# Altium PCB CANLink.PcbDoc (part 2 of 2)
Units mm, origin at the board's own origin, x right, y up, seen from the top; angles counter-clockwise.
Board outline 75 x 49 mm, 2 copper layers (Top Layer, Bottom Layer); 106 components, 90 nets, 440 pads, 174 vias.
Unrouted connection lines stored in the file: 6.
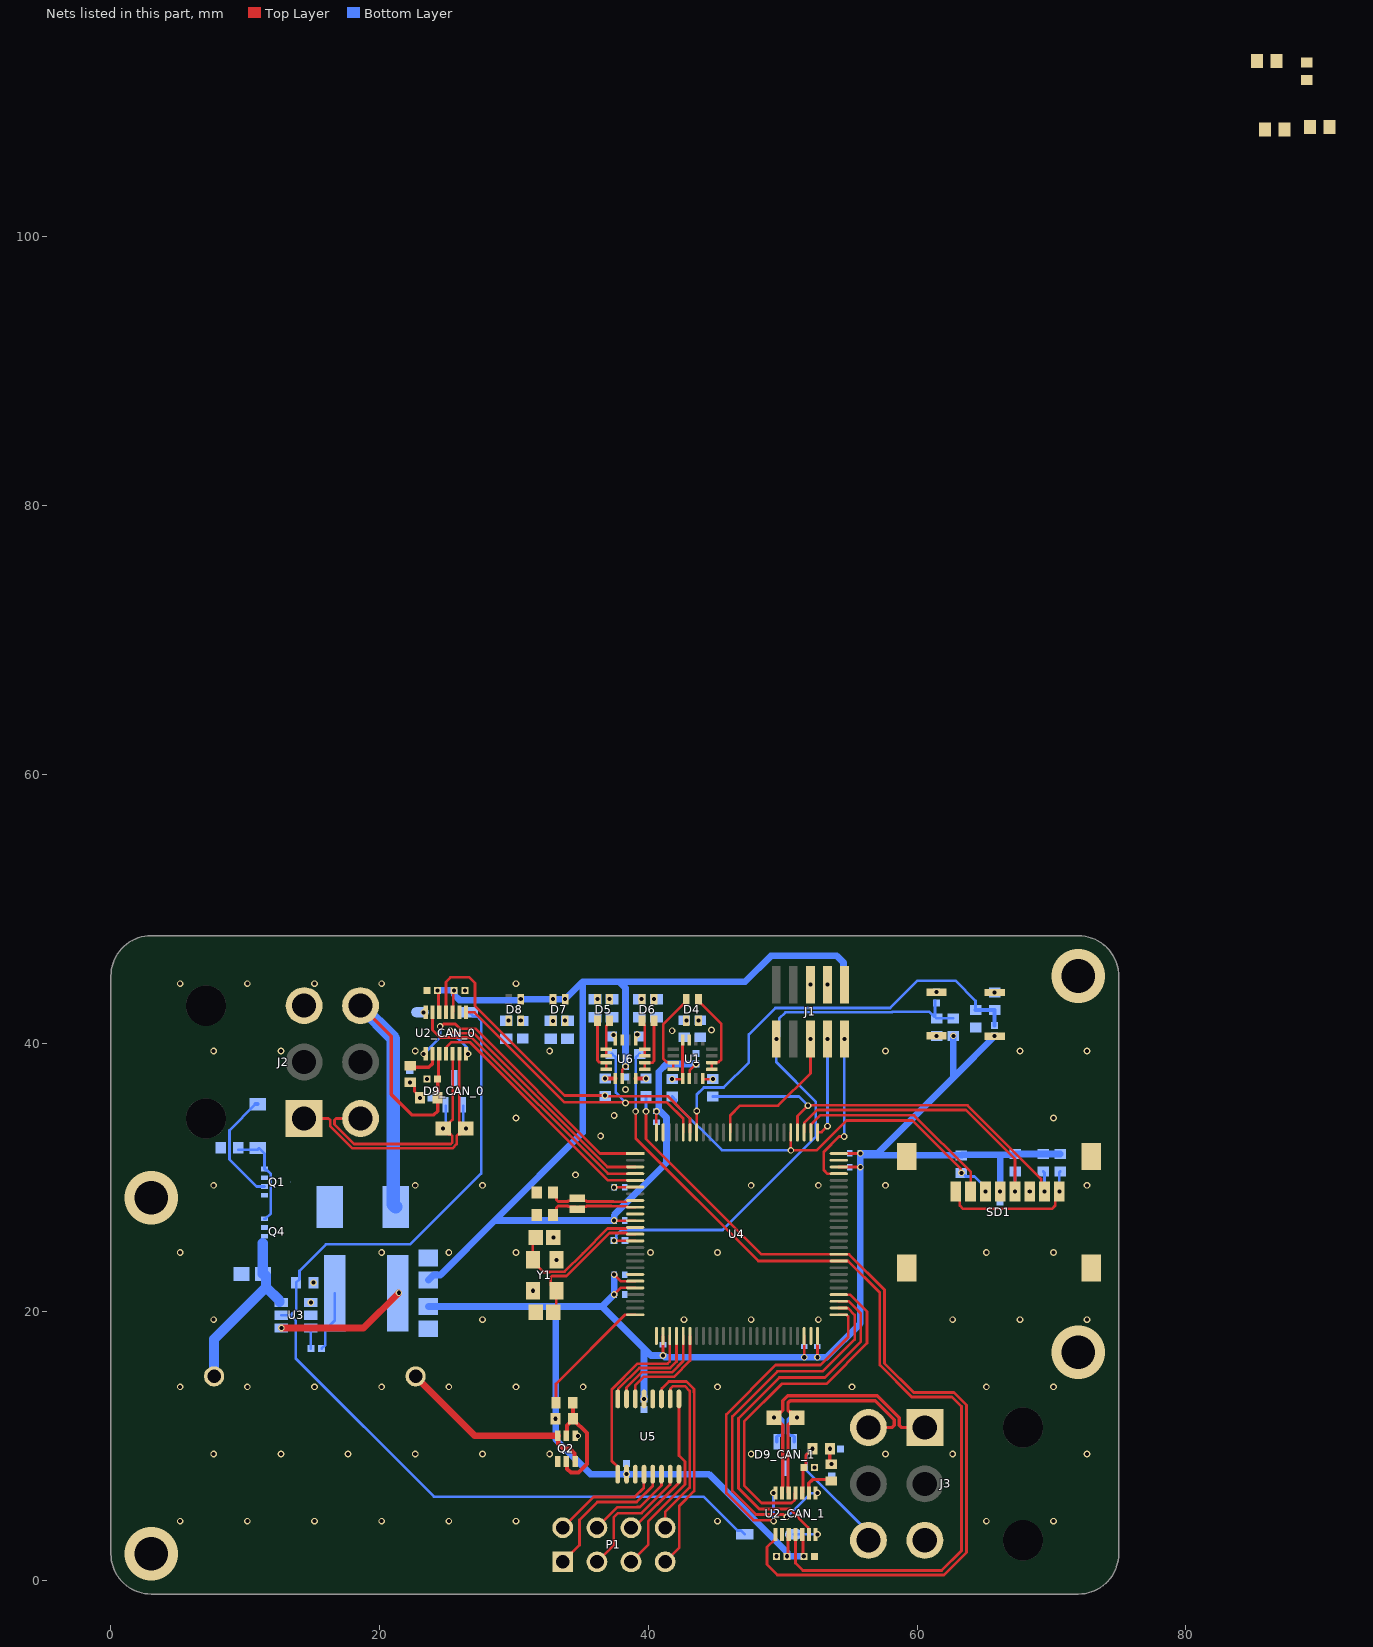
[diagram p2: the nets of this part, all layers, seen from the top]

## Part data (continued)
U3: library part CMP-12757-000006-1, "IC REG BUCK 3.3V 2A TSOT26", Ambient Temperature Range High=+85°C, Ambient Temperature Range Low=-40°C, Manufacturer="Diodes Inc.", Max Junction Temp=+160°C, Max Supply Voltage=32V, Min Supply Voltage=3.8V, Nominal Supply Current=22uA, Output Current=2A, Output Voltage=3.3V, Package=TSOT26, Switching Frequency=1.1MHz, Temperature="to +160°C", Automotive=No, Category=IC, ComponentLink2Description=Datasheet, ComponentLink2URL=https://www.diodes.com/assets/Datasheets/AP63200-AP63201-AP63203-AP63205.pdf, Device Class L1="Integrated Circuits (ICs)", Device Class L2="Power Management ICs", Device Class L3="Voltage Regulators - Switching", Digikey Description="IC REG BUCK 3.3V 2A TSOT26", Footprint Url=https://www.diodes.com/assets/Package-Files/TSOT26.pdf, Height=1mm, Lead Free=Yes, Manufacturer Part Number=AP63203WU-7, Mouser Description="AP63203 Series 3.3 V 2 A SMT Fixed Low IQ Synchronous Buck - TSOT-26", Number of Outputs=1, Octopart=https://octopart.com/ap63203wu-7-diodes+inc.-98099550, Output Type=Fixed, RoHS=TRUE, Standoff Height=0.01mm, Switching Topology=Buck, Temperature Range High=+160°C
U4: library part CMP-12105-000107-1, "IC MCU 32BIT 128KB FLASH 100LQFP"
U5: library part CMP-0054-00372-2, "8-Channel, 50 kSPS to 200 kSPS, 8-Bit A/D Converter, 16-pin TSSOP, Pb-Free", Manufacturer="National Semiconductor", PackageTopMarking=NSUZXYTT*88S022*CIMT, PowerWise=Y, Code_JEDEC=MO-153-AB, ComponentLink1Description="ADC088S022 Datasheet", ComponentLink1URL=http://www.national.com/ds/AD/ADC088S022.pdf, ComponentLink2Description="ADC088S022 Web Page", ComponentLink2URL=http://www.national.com/pf/AD/ADC088S022.html, ComponentLink3Description="MTC16 Package Page", ComponentLink3URL=http://www.national.com/packaging/folders/mtc16.html, CompType="ADC IC", DatasheetVersion=Feb-2010, PackageDescription="Molded TSSOP, Jedec, 5 x 4.4 x 0.9mm Body, 16 Lead, 0.65mm Pitch", PackageReference=MTC16, PackageVersion="revD, Jun-2003", PinCount=16, RevisionNote="Component URLs added", RoHS=Y
Y1: library part CMP-27762-011708-1, "Crystal 48MHz ±20ppm 18pF SMD-4 3.2mm x 2.5mm", Case/Package=CSMD, ESR (Equivalent Series Resistance)=35R, Frequency=48MHz, Frequency Stability=50ppm, Frequency Tolerance=20ppm, Load Capacitance=18pF, Max Operating Temperature=70°C, Min Operating Temperature=-20°C, Operating Frequency="48 MHz", Package Quantity=1000, Resistor Type=Ceramic, Depth=2.5mm, Height=0.031inch, Lead Free="Lead Free", Length=3.2mm, Mount="Surface Mount", Number of Pins=4, Packaging="Tape and Reel", Radiation Hardening=No, REACH SVHC="No SVHC", RoHS Compliant=Yes, Series=ABM8, Series Resistance=35R, Termination=SMD/SMT, Tolerance=20ppm, Width=0.098inch
Y2: library part CMP-40224-000006-1, "CRYSTAL 32.7680KHZ 12.5PF SMD", Frequency=32.768kHz, Load Capacitance=12.5pF, Manufacturer="ECS International", Package=ECX-1210, Temperature="-40°C to +85°C", Temperature Range High=+85°C, Temperature Range Low=-40°C, Tolerance=20ppm, Automotive=No, Category=Crys, ComponentLink2Description=Datasheet, ComponentLink2URL=https://ecsxtal.com/store/pdf/ECX-1210.pdf, Device Class L1="Passive Components", Device Class L2="Crystals / Oscillators", Device Class L3=Crystals, Digikey Description="CRYSTAL 32.7680KHZ 12.5PF SMD", Esr=90kΩ, Height=0.5mm, Lead Free=Yes, Manufacturer Part Number=ECS-.327-12.5-1210-TR, Octopart=https://octopart.com/ecs-.327-12.5-1210-tr-ecs+international-81221340, RoHS=TRUE, Series=ECX-1210

## Via types
v1: diameter 0.5, hole 0.3, Top Layer to Bottom Layer, 170 vias
v2: diameter 4, hole 2.5, Top Layer to Bottom Layer, 4 vias

## Nets (pads, with @x,y where several pads share a name; then routed paths per layer and width w, separated by ;. In a path a pad name is that pad's centre, name@x,y a point inside that pad or via, vN(x,y) a via of type N, cw(c..) or ccw(c..) an arc to the next point about the centre after c; other vN are vias at no path point)
AN_IO_0: P1.2 U5.4 | length 8.3
  Top Layer w0.2: P1.2@33.63,3.94 35.915,6.225 38.975,6.225 39.663,6.913 39.663,7.913 U5.4@39.675,7.925
AN_IO_1: P1.1 U5.5 | length 11
  Top Layer w0.2: P1.1@33.63,1.4 34.875,2.645 34.875,4.525 36.2,5.85 39.125,5.85 40.325,7.05 U5.5@40.325,7.925
AN_IO_2: P1.4 U5.6 | length 7
  Top Layer w0.2: P1.4@36.17,3.94 37.703,5.473 39.148,5.473 39.15,5.475 39.375,5.475 40.975,7.075 U5.6@40.975,7.925
AN_IO_3: P1.3 U5.7 | length 9.8
  Top Layer w0.2: P1.3@36.17,1.4 37.425,2.655 37.425,4.725 37.725,5.025 39.5,5.025 41.614,7.139 41.614,7.914 U5.7@41.625,7.925
AN_IO_4: P1.6 U5.8 | length 5.6
  Top Layer w0.2: P1.6@38.71,3.94 38.94,3.94 42.246,7.246 42.246,7.896 U5.8@42.275,7.925
AN_IO_5: P1.5 U5.9 | length 14
  Top Layer w0.2: P1.5@38.71,1.4 40,2.69 40,4.425 42.725,7.15 42.725,8.85 42.275,9.3 U5.9@42.275,13.525
AN_IO_6: P1.8 U5.10 | length 13.4
  Top Layer w0.2: P1.8@41.25,3.94 41.25,5.1 43.075,6.925 43.075,13.888 43.073,13.89 43.073,14.115 42.713,14.475 41.825,14.475 41.648,14.298 41.648,13.548 U5.10@41.625,13.525
AN_IO_7: P1.7 U5.11 | length 17.4
  Top Layer w0.2: U5.11@40.975,13.525 40.998,13.548 40.998,14.298 41.525,14.825 42.825,14.825 43.4,14.25 43.4,14.025 43.402,14.023 43.402,6.677 42.3,5.575 42.3,2.45 P1.7@41.25,1.4
BOOT: C30.1 R35.2 R36.1 U4.94 | length 32.2
  Top Layer w0.2: U4.94@43.594,33.363 43.596,33.366 43.596,34.946 v1(43.6,34.95)
  Bottom Layer w0.2: v1(43.6,34.95) 43.6,36.175 44.125,36.7 45.6,36.7 47.475,38.575 47.475,40.65 49.45,42.625 57.998,42.625 60.023,44.65 62.85,44.65 64.35,43.15 R35.2@64.35,42.475
  Bottom Layer w0.3: R35.2@64.35,42.475 R36.1@65.775,42.475 C30.1@65.775,41.325
BUZZ: R28.1 U4.25 | length 9.4
  Top Layer w0.2: R28.1@33.125,13.25 33.125,14.65 38.263,19.788 U4.25@39.019,19.788
BUZZ_NEG: LS1.N Q2.3 Q2.6 | length 15.1
  Top Layer w0.3: Q2.6@33.249,10.774 Q2.6@33.25,10.775 33.292,10.733 33.292,10.181 33.65,9.823 34.16,9.823 34.511,9.472 34.511,8.914 Q2.3@34.55,8.875
  Top Layer w0.5: LS1.N@22.675,15.2 27.101,10.774 Q2.6@33.249,10.774
  Bottom Layer w0.3: LS1.N@22.674,15.199 LS1.N@22.675,15.2
CAN0_N: D9_CAN_0.2 J2.4 R10_CAN_0.1 U2_CAN_0.12 | length 20.8
  Top Layer w0.2: J2.4@18.58,34.395 16.761,34.395 16.643,34.278 16.643,33.963 18.107,32.499 25.287,32.499 25.404,32.616 25.404,33.1 25.287,33.217 25.143,33.217 v1(24.718,33.642) 24.768,33.642 25.433,34.307 U2_CAN_0.12@25.433,39.211
  Bottom Layer w0.2: v1(24.718,33.642) 24.718,33.723 24.918,33.923 D9_CAN_0.2@24.918,35.318
CAN0_P: D9_CAN_0.1 J2.1 R10_CAN_0.2 U2_CAN_0.13 | length 21.8
  Top Layer w0.2: J2.1@14.38,34.395 16.199,34.395 16.317,34.278 16.317,33.827 17.972,32.172 25.423,32.172 25.731,32.481 25.731,33.1 25.849,33.217 25.993,33.217 v1(26.418,33.642) 26.368,33.642 25.943,34.067 25.943,34.174 25.933,34.184 U2_CAN_0.13@25.933,39.211
  Bottom Layer w0.2: D9_CAN_0.1@26.218,35.318 26.218,33.923 26.418,33.723 v1(26.418,33.642)
CAN0_RX: R19.1 U2_CAN_0.4 U4.95 | length 27
  Top Layer w0.2: U2_CAN_0.4@24.933,42.297 24.933,44.558 25.275,44.9 26.675,44.9 27.1,44.475 27.1,42.762 33.76,36.102 v1(36.775,36.102) 36.827,36.05 41.45,36.05 43.094,34.406 U4.95@43.094,33.363
CAN0_TX: R22.1 U2_CAN_0.1 U4.96 | length 24.6
  Top Layer w0.2: U2_CAN_0.1@26.433,42.297 27.053,42.297 33.75,35.6 38.25,35.6 v1(38.3,35.55) ; v1@38.3,35.6 41.375,35.6 42.594,34.381 U4.96@42.594,33.363
  Bottom Layer w0.2: R22.1@37.25,39.2 37.3,39.2 37.575,38.925 37.575,36.325 38.3,35.6 v1(38.3,35.55)
CAN1_N: D9_CAN_1.2 J3.4 R10_CAN_1.1 U2_CAN_1.12 | length 21
  Top Layer w0.254: U2_CAN_1.12@50.448,6.532 50.422,6.557 50.422,6.945 50.388,6.979 50.388,9.161 50.391,9.163 50.391,11.578 50.539,11.727 50.652,11.727 v1(51.05,12.125) 50.652,12.523 50.539,12.523 50.391,12.672 50.391,13.226 50.539,13.375 56.883,13.375 58.284,11.974 58.284,11.549 58.136,11.4 J3.4@56.375,11.4
  Bottom Layer w0.254: 50.391,11.266 50.391,10.948 50.539,10.799 50.748,10.799 50.85,10.698 D9_CAN_1.2@50.85,10.342 ; 50.391,11.266 50.391,11.976 50.539,12.125 v1(51.05,12.125)
CAN1_P: D9_CAN_1.1 J3.1 R10_CAN_1.2 U2_CAN_1.13 | length 22.3
  Top Layer w0.254: U2_CAN_1.13@49.948,6.532 49.973,6.557 49.973,6.945 50.007,6.979 50.007,9.319 50.01,9.321 50.01,11.578 49.861,11.727 49.748,11.727 v1(49.35,12.125) 49.748,12.523 49.861,12.523 50.01,12.672 50.01,13.384 50.381,13.756 57.041,13.756 58.665,12.132 58.665,11.549 58.814,11.4 J3.1@60.575,11.4
  Bottom Layer w0.254: v1(49.35,12.125) 49.861,12.125 50.01,11.976 50.01,11.424 ; D9_CAN_1.1@49.55,10.342 49.55,10.698 49.652,10.799 49.861,10.799 50.01,10.948 50.01,11.424
CAN1_RX: R23.1 U2_CAN_1.4 U4.59 | length 68.2
  Top Layer w0.2: v1(39.05,34.925) 39.05,32.925 48.187,23.788 U4.59@54.169,23.788 54.172,23.786 54.864,23.786 57.225,21.425 57.225,16.05 59.602,13.673 62.602,13.673 63.3,12.975 63.3,2.225 61.825,0.75 51.5,0.75 50.948,1.302 U2_CAN_1.4@50.948,3.446
  Bottom Layer w0.2: v1(39.05,34.925) 39.05,38.925 39.325,39.2 R23.1@39.35,39.2
CAN1_TX: R26.1 U2_CAN_1.1 U4.60 | length 67.5
  Top Layer w0.2: 39.825,34.654 39.825,32.875 48.412,24.288 U4.60@54.169,24.288 54.172,24.286 54.939,24.286 57.575,21.65 57.575,16.175 59.75,14 62.737,14 63.675,13.062 63.675,2.1 61.998,0.423 49.602,0.423 48.825,1.2 48.825,2.487 49.448,3.109 U2_CAN_1.1@49.448,3.446
  Bottom Layer w0.2: v1(39.825,34.925) R26.1@39.825,36.075
CAN_INH_CAN_0: D2.2 U2_CAN_0.7
  other v1: 23.28,42.297
CAN_INH_CAN_1: D3.2 U2_CAN_1.7 | length 1.8
  Bottom Layer w0.2: D3.2@50.825,3.45 50.827,3.448 52.599,3.448 v1(52.601,3.446)
CAN_MISO_CAN_0: U2_CAN_0.6 U4.4 | length 20.8
  Top Layer w0.2: U2_CAN_0.6@23.933,42.297 23.933,40.992 24.5,40.425 25.038,40.425 25.04,40.423 26.852,40.423 36.987,30.288 U4.4@39.019,30.288
CAN_MISO_CAN_1: U2_CAN_1.6 U4.53 | length 27.7
  Top Layer w0.2: U2_CAN_1.6@51.948,3.446 51.896,3.498 51.896,3.961 50.531,5.325 48.25,5.325 46.7,6.875 46.7,12.075 49.75,15.125 53.15,15.125 55.8,17.775 55.8,19.9 55.375,20.325 54.914,20.786 54.172,20.786 U4.53@54.169,20.788
CAN_MOSI_CAN_0: U2_CAN_0.11 U4.5 | length 19
  Top Layer w0.2: U2_CAN_0.11@24.933,39.211 24.985,39.263 24.985,39.726 25.335,40.075 26.704,40.075 36.991,29.788 U4.5@39.019,29.788
CAN_MOSI_CAN_1: U2_CAN_1.11 U4.54 | length 26.3
  Top Layer w0.2: U2_CAN_1.11@50.948,6.532 50.896,6.48 50.896,6.017 50.653,5.775 48.425,5.775 47.125,7.075 47.125,11.85 49.925,14.65 53.25,14.65 56.275,17.675 56.275,20.025 55.014,21.286 54.172,21.286 U4.54@54.169,21.288
CAN_nCS_CAN_0: U2_CAN_0.14 U4.3 | length 20.2
  Top Layer w0.2: v1(25.25,40.925) 25.331,40.925 25.506,40.75 26.987,40.75 36.949,30.788 U4.3@39.019,30.788
  Bottom Layer w0.2: v1(25.25,40.925) 26.528,39.647 26.528,39.268 v1(26.586,39.211)
CAN_nCS_CAN_1: U2_CAN_1.14 U4.51 | length 26.1
  Top Layer w0.2: v1(49.325,4.425) 49.25,4.5 47.825,4.5 45.8,6.525 45.8,12.375 49.475,16.05 52.8,16.05 54.875,18.125 54.875,19.665 54.754,19.786 54.172,19.786 U4.51@54.169,19.788
  Bottom Layer w0.2: v1(49.295,6.532) 49.31,6.517 49.31,4.44 v1(49.325,4.425)
CAN_PWR: C5_CAN_1.2 J3.6 R11_CAN_1.1 U2_CAN_1.10 | length 12.5
  Top Layer w0.2: U2_CAN_1.10@51.448,6.532 51.501,6.584 51.501,8.355 C5_CAN_1.2@51.564,8.418 51.724,8.578 51.724,9.336 51.878,9.49 51.928,9.49 52.203,9.765 v1(52.203,9.815)
  Bottom Layer w0.2: v1(52.203,9.815) 51.775,9.387 51.775,8.2 56.375,3.6 J3.6@56.375,3
CAN_SCLK_CAN_0: U2_CAN_0.8 U4.1 | length 21.1
  Top Layer w0.2: v1(24.5,41.25) 24.581,41.25 24.756,41.425 25.625,41.425 25.973,41.077 27.123,41.077 36.412,31.788 U4.1@39.019,31.788
  Bottom Layer w0.2: v1(23.28,39.211) 24.5,40.431 v1(24.5,41.25)
CAN_SCLK_CAN_1: U2_CAN_1.8 U4.52 | length 28.1
  Top Layer w0.2: v1(50.3,4.75) 50.219,4.75 50.044,4.925 48,4.925 46.25,6.675 46.25,12.225 49.6,15.575 52.975,15.575 55.35,17.95 55.35,19.775 54.843,20.282 54.839,20.286 54.172,20.286 U4.52@54.169,20.288
  Bottom Layer w0.2: v1(50.3,4.75) 52.051,6.501 52.57,6.501 v1(52.601,6.532)
G_LED: R29.2
GND: C1.2 C2.1 C3_CAN_0.1 C3_CAN_1.1 C4_CAN_0.1 C4_CAN_1.1 C5_CAN_0.1 C5_CAN_1.1 C6_CAN_0.1 C6_CAN_1.1 C8.2 C9.2 C10.2 C11.2 C12.2 C13.2 C14.1 C15.1 C16.1 C17.1 C18.1 C19.1 C20.1 C21.1 C22.1 C23.1 C24.1 C25.1 C26.2 C27.2 C28.2 C29.2 D9_CAN_0.3 D9_CAN_1.3 J1.3 J1.5 J2.3 J3.3 Q2.1 Q2.4 R4.2 R5.2 R8.2 R13_CAN_0.1 R13_CAN_1.1 R16.2 R17.1 R18.2 R20.2 R21.2 R24.2 R25.2 R32.2 R34.2 R35.1 SD1.6 SD1.9 SD1.10 SD1.11 SD1.12 SW1.2 U1.11 U2_CAN_0.2 U2_CAN_1.2 U3.4 U4.10 U4.19 U4.26 U4.49 U4.74 U4.99 U5.3 U5.12 U6.11 Y1.2 Y1.4 | length 0.2
  Top Layer w0.254: J2.3@14.38,42.795 J2.3@14.618,42.795
  other v1: 49.532,1.814 5.15,4.425 10.15,4.425 15.15,4.425 20.15,4.425 25.15,4.425 30.15,4.425 45.15,4.425 65.15,4.425 70.15,4.425 52.364,8.418 7.65,9.425 12.65,9.425 17.65,9.425 22.65,9.425 27.65,9.425 32.65,9.425 47.65,9.425 57.65,9.425 62.65,9.425 72.65,9.425 34.75,10.775 5.15,14.425 10.15,14.425 15.15,14.425 20.15,14.425 25.15,14.425 30.15,14.425 35.15,14.425 45.15,14.425 55.15,14.425 65.15,14.425 70.15,14.425 7.65,19.425 27.65,19.425 42.65,19.425 47.65,19.425 52.65,19.425 62.65,19.425 67.65,19.425 72.65,19.425 14.881,20.7 31.4,21.575 15.081,22.175 33.15,23.875 5.15,24.425 20.15,24.425 25.15,24.425 30.15,24.425 40.15,24.425 45.15,24.425 65.15,24.425 70.15,24.425 32.925,25.55 68.382,28.966 7.65,29.425 22.65,29.425 27.65,29.425 47.65,29.425 52.65,29.425 57.65,29.425 72.65,29.425 34.575,30.2 36.45,33.1 30.15,34.425 70.15,34.425 37.45,34.625 38.3,36.55 23.517,37.325 7.65,39.425 12.65,39.425 22.65,39.425 32.65,39.425 57.65,39.425 67.65,39.425 72.65,39.425 41.775,40.925 44.7,40.975 61.45,43.8 26.349,43.929 52.06,44.35 53.33,44.35 5.15,44.425 10.15,44.425 15.15,44.425 20.15,44.425 30.15,44.425
  other v2: 3,2 72,17 3,28.5 72,45
INT_3V3: C1.1 C2.2 C3_CAN_0.2 C3_CAN_1.2 C4_CAN_0.2 C4_CAN_1.2 C9.1 C10.1 C12.1 C13.1 C14.2 C15.2 C16.2 C17.2 C18.2 C19.2 C20.2 C21.2 C23.2 C29.1 C30.2 D7.2 D7.3 D8.2 J1.1 L1.2 R1.2 R2.2 R3.2 R6.2 R15.2 R27.2 R33.1 SD1.4 SW2.2 U1.2 U2_CAN_0.3 U2_CAN_0.5 U2_CAN_1.3 U2_CAN_1.5 U3.1 U4.11 U4.20 U4.21 U4.27 U4.48 U4.50 U4.73 U4.75 U4.100 U5.2 U5.13 U6.2 | length 246.7
  Top Layer w0.2: v1(24.317,43.929) 24.38,43.866 24.38,42.349 U2_CAN_0.5@24.433,42.297 ; U2_CAN_0.3@25.433,42.297 25.486,42.349 25.486,43.866 v1(25.549,43.929) ; v1(37.45,21.3) 37.938,21.788 U4.21@39.019,21.788 ; v1(37.45,22.775) 37.937,22.288 U4.20@39.019,22.288 ; v1(37.45,26.8) 37.46,26.79 39.016,26.79 U4.11@39.019,26.788 ; U6.2@38.05,37.365 38.05,38.019 38.3,38.269 v1(38.3,38.275) ; U4.100@40.594,33.363 40.596,33.366 40.596,34.921 v1(40.6,34.925) ; v1(41.094,16.75) U4.27@41.094,18.213 ; U1.2@43.04,37.37 43.07,37.4 43.07,37.97 v1(43.55,38.45) ; v1(50.332,1.814) 50.395,1.877 50.395,3.394 U2_CAN_1.3@50.448,3.446 ; U2_CAN_1.5@51.448,3.446 51.501,3.394 51.501,1.877 v1(51.564,1.814) ; U4.48@51.594,18.213 51.596,18.21 51.596,16.629 v1(51.6,16.625) ; v1(52.575,16.625) 52.592,16.642 52.592,18.21 U4.50@52.594,18.213 ; U4.73@54.169,30.788 54.172,30.786 55.764,30.786 v1(55.775,30.775) ; U4.75@54.169,31.788 54.172,31.79 55.765,31.79 v1(55.775,31.8)
  Top Layer w0.5: v1(12.682,18.8) 18.8,18.8 v1(21.425,21.425)
  Bottom Layer w0.5: C9.1@23.628,20.398 33.075,20.398 ; C10.1@23.628,22.371 24.005,22.748 24.517,22.748 28.569,26.8 ; v1(24.317,43.929) v1(25.549,43.929) 25.549,43.601 25.95,43.2 30.427,43.2 v1(30.5,43.273) v1(32.906,43.273) v1(33.806,43.273) 35.108,44.575 ; v1(37.45,22.775) v1(37.45,21.3) 36.548,20.398 ; v1(38.3,38.275) 38.3,44.1 37.825,44.575 ; v1(39.675,13.525) 39.675,17.27 ; v1(43.55,38.45) 41.35,38.45 40.775,37.875 40.775,35.1 v1(40.6,34.925) 40.9,34.925 41.35,34.475 41.35,31.1 37.45,27.2 v1(37.45,26.8) 28.569,26.8 ; v1(51.564,1.814) v1(50.332,1.814) 50.332,2.093 44.5,7.925 v1(38.375,7.925) 35.7,7.925 33.1,10.525 v1(33.1,12.048) 33.1,20.373 33.075,20.398 ; J1.1@54.6,44.35 54.525,44.425 54.525,46 54.025,46.5 49.125,46.5 47.2,44.575 37.825,44.575 ; v1(62.7,40.55) 62.7,37.6 62.775,37.525 ; v1(65.775,40.525) 62.775,37.525 ; v1(66.182,28.966) 66.182,31.643 66.125,31.7 ; R1.2@67.3,31.75 R3.2@69.389,31.749 R6.2@70.659,31.749 ; R1.2@67.3,31.75 67.25,31.7 66.125,31.7 ; 28.569,26.8 35.108,33.34 35.108,44.575 ; 33.075,20.398 36.548,20.398 ; 35.108,44.575 37.825,44.575 ; 36.548,20.398 39.675,17.27 ; 39.675,17.27 40.195,16.75 v1(41.094,16.75) 41.215,16.629 C20.2@51.596,16.629 v1(51.6,16.625) v1(52.575,16.625) 53.25,16.625 55.775,19.15 v1(55.775,30.775) v1(55.775,31.8) ; v1(55.775,31.8) 57.05,31.8 62.775,37.525 ; v1(55.775,31.8) 55.925,31.65 R2.2@63.3,31.65 63.35,31.7 66.125,31.7
INT_3V3_SENSE: R15.1 R17.2
NetC6_CAN_0_2: C6_CAN_0.2 R11_CAN_0.2 R12_CAN_0.2 R13_CAN_0.2 | length 1.5
  Top Layer w0.2: v1(22.247,37.071) 22.351,37.071 22.591,36.831 22.591,36.4 23.009,35.982 v1(23.009,35.928)
NetC6_CAN_1_2: C6_CAN_1.2 R11_CAN_1.2 R12_CAN_1.2 R13_CAN_1.2 | length 1.2
  Top Layer w0.254: v1(53.503,9.815) 53.503,8.803 v1(53.634,8.672)
NetC7_1: C7.1 U3.6 | length 1.5
  Bottom Layer w0.2: C7.1@14.881,17.275 U3.6@14.881,18.8
NetC7_2: C7.2 L1.1 U3.5 | length 4.5
  Bottom Layer w0.2: C7.2@15.681,17.275 15.956,17.55 15.956,18.65 16.656,19.35 L1.1@16.656,21.4
NetC22_2: C22.2 U4.6 | length 1.6
  Top Layer w0.2: v1(37.45,29.275) 37.461,29.286 39.016,29.286 U4.6@39.019,29.288
NetD4_1: D4.1 R5.1
  other v1: 43.724,41.675
NetD4_2: D4.2 U1.5 U1.6 | length 6.5
  Top Layer w0.2: D4.2@43.724,43.275 43.724,43.125 45.425,41.424 45.425,38.775 45.235,38.585 44.755,38.585 U1.6@44.725,38.555 U1.5@44.725,38.055
NetD4_3: D4.3 U1.15 U1.16 | length 6.5
  Top Layer w0.2: U1.16@41.855,38.055 U1.15@41.855,38.555 41.825,38.585 41.365,38.585 41.1,38.85 41.1,41.401 42.824,43.125 D4.3@42.824,43.275
NetD4_4: D4.4 R8.1
  other v1: 42.824,41.675
NetD5_1: D5.1 R20.1
  other v1: 36.2,43.275
NetD5_2: D5.2 U6.15 U6.16 | length 4.2
  Top Layer w0.2: D5.2@36.212,41.673 36.212,38.71 36.342,38.58 36.835,38.58 U6.15@36.865,38.55 U6.16@36.865,38.05
NetD5_3: D5.3 U6.13 U6.14 | length 2.7
  Top Layer w0.2: U6.14@36.865,39.05 36.865,41.276 37.112,41.523 D5.3@37.112,41.673
NetD5_4: D5.4 R21.1
  other v1: 37.1,43.275
NetD6_1: D6.1 R24.1
  other v1: 39.493,43.273
NetD6_2: D6.2 U6.7 U6.8 | length 2.7
  Top Layer w0.2: D6.2@39.518,41.673 39.518,41.523 39.735,41.305 U6.7@39.735,39.05
NetD6_3: D6.3 U6.5 U6.6 | length 4.2
  Top Layer w0.2: U6.5@39.735,38.05 U6.6@39.735,38.55 40.301,38.55 40.418,38.667 D6.3@40.418,41.673
NetD6_4: D6.4 R25.1
  other v1: 40.418,43.273
NetD7_1: D7.1 R29.1
  other v1: 33.806,41.673
NetD7_4: D7.4 R30.1
  other v1: 32.906,41.648
NetD8_1: D8.1 R32.1
  other v1: 30.5,41.673
NetD8_4: D8.4 R34.1
  other v1: 29.6,41.673
NetF1_2: F1.2 Q1.5-6-7-8 Q4.5-6-7-8
NetQ2_2: Q2.2 Q2.5 R27.1 R28.2 | length 8.9
  Top Layer w0.3: Q2.2@33.9,8.875 33.95,8.825 33.95,8.325 34.225,8.05 34.8,8.05 35.425,8.675 35.425,10.973 R27.1@34.4,11.998 ; Q2.5@33.9,10.775 33.95,10.825 33.95,11.548 R27.1@34.4,11.998 ; R28.2@34.375,13.25 34.387,13.237 34.387,12.061 R27.1@34.4,12.048 R27.1@34.4,11.998
NetR7_2: R7.2 U1.4 | length 0.8
  Top Layer w0.2: U1.4@44.04,37.37 44.04,37.355 44.07,37.325 v1(44.8,37.325)
NetR9_1: R9.1 U1.1 U1.12 | length 3.7
  Top Layer w0.2: v1(41.775,37.325) 42.51,37.325 42.54,37.355 U1.1@42.54,37.37 U1.12@42.54,40.24
NetR12_CAN_0_1: R12_CAN_0.1 U2_CAN_0.9 | length 2.6
  Top Layer w0.254: R12_CAN_0.1@22.266,38.331 22.383,38.214 23.663,38.214 23.933,38.484 U2_CAN_0.9@23.933,39.211
NetR12_CAN_1_1: R12_CAN_1.1 U2_CAN_1.9 | length 2.6
  Top Layer w0.254: U2_CAN_1.9@51.948,6.532 51.948,7.259 52.218,7.529 53.498,7.529 R12_CAN_1.1@53.615,7.412
NetR19_2: R19.2 U6.1 | length 0.8
  Top Layer w0.3: v1(36.775,37.375) 36.78,37.37 37.545,37.37 U6.1@37.55,37.365
NetR22_2: R22.2 U6.12
  other v1: 37.42,40.623
NetR23_2: R23.2 U6.9
  other v1: 39.17,40.645
NetR26_2: R26.2 U6.4 | length 0.8
  Top Layer w0.3: U6.4@39.05,37.365 39.055,37.37 39.82,37.37 v1(39.825,37.375)
NetR31_2: R31.2 SW1.1
  other v1: 61.45,40.55
NetR36_2: R36.2 SW2.1
  other v1: 65.775,43.775
PRE_VCC: C8.1 D1.1 LS1.P Q1.1 Q1.2 Q1.3 Q4.1 Q4.2 Q4.3 R14.2 U3.3 | length 21.7
  Bottom Layer w0.2: D1.1@10.77,35.46 8.825,33.515 8.825,33.025 8.825,31.35 10.837,29.338 Q1.2@11.425,29.338
  Bottom Layer w0.3: D1.1@10.77,35.46 D1.1@10.925,35.46
  Bottom Layer w0.75: LS1.P@7.675,15.2 7.675,17.972 11.542,21.839 ; C8.1@11.3,22.825 Q4.1@11.3,25.138 ; C8.1@11.327,22.825 11.411,22.825 11.542,22.694 11.542,21.839 ; U3.3@12.557,20.725 12.557,20.825 11.542,21.839
PWR_IN: C5_CAN_0.2 F1.1 J2.6 R11_CAN_0.1 U2_CAN_0.10 | length 32.2
  Top Layer w0.2: C5_CAN_0.2@24.315,37.323 C5_CAN_0.2@24.317,37.325 24.38,37.388 24.38,39.159 U2_CAN_0.10@24.433,39.211
  Top Layer w0.254: J2.6@18.58,42.795 20.85,40.525 20.85,36.182 22.374,34.658 24.025,34.658 24.313,34.946 R11_CAN_0.1@24.313,35.928 24.315,35.93 C5_CAN_0.2@24.315,37.323
  Bottom Layer w1: J2.6@18.58,42.795 21.025,40.35 21.025,27.993 F1.1@21.205,27.813
R_LED: R30.2
REG_EN: D2.1 D3.1 R18.1 U3.2 | length 75.5
  Bottom Layer w0.2: U3.2@12.682,19.75 13.381,19.75 ; D2.1@26.65,42.3 26.931,42.019 27.231,42.019 27.55,41.7 27.55,30.3 22.275,25.025 16,25.025 14.033,23.058 14.033,22.427 R18.1@13.781,22.175 13.781,20.15 13.381,19.75 ; D3.1@47.175,3.45 46.894,3.731 46.619,3.731 44.1,6.25 24.05,6.25 13.75,16.55 13.75,19.381 13.381,19.75
RESETN: C11.1 C26.1 J1.10 R31.1 R33.2 U4.14 | length 44.6
  Top Layer w0.2: v1(37.45,25.3) 37.46,25.29 39.016,25.29 U4.14@39.019,25.288
  Bottom Layer w0.2: v1(37.45,25.3) 37.61,25.46 37.61,25.71 38,26.1 45.525,26.1 52.45,33.025 52.45,35.65 49.52,38.58 v1(49.52,40.32) 49.737,40.537 49.737,41.837 50.198,42.298 58.133,42.298 58.185,42.35 60.9,42.35 61.275,41.975 R31.1@61.325,41.975 ; C26.1@61.325,43.15 R31.1@61.325,41.975 ; R33.2@62.7,41.85 R31.1@61.45,41.85 R31.1@61.325,41.975
RP_MOS_LINK: D1.2 Q1.4 Q4.4 R4.1 | length 7.5
  Bottom Layer w0.2: R4.1@9.475,32.075 10.915,32.075 11.03,32.19 11.425,31.795 Q1.4@11.425,30.638 11.5,30.563 11.596,30.563 11.902,30.257 11.902,27.565 11.9,27.563 11.9,27.338 11.5,26.938 Q4.4@11.425,26.938
SD_CLK: R1.1 SD1.5 U4.78 | length 22.2
  Top Layer w0.2: U4.78@51.594,33.363 51.596,33.366 51.596,34.071 52.55,35.025 63.625,35.025 67.282,31.368 v1(67.282,28.966)
  Bottom Layer w0.2: v1(67.282,28.966) 67.282,30.432 R1.1@67.3,30.45
SD_CMD: R2.1 R9.2 SD1.3 U4.80 | length 29.9
  Top Layer w0.2: U4.80@50.594,33.363 50.596,33.361 50.596,32.029 v1(50.6,32.025) 52.525,32.025 54.75,34.25 59.65,34.25 63.243,30.657 63.243,30.407 v1(63.3,30.35)
  Bottom Layer w0.2: R9.2@41.775,36.025 42.033,35.767 42.033,35.467 45.462,32.038 v1@50.596,32.038 ; v1(63.3,30.35) 63.35,30.35 63.625,30.075 64.275,30.075 65.044,29.306 65.044,29.004 v1(65.082,28.966)
SD_CS: SD1.2 U4.77 | length 16
  Top Layer w0.2: U4.77@52.094,33.363 52.094,33.935 52.784,34.625 59.775,34.625 64,30.4 64,28.984 SD1.2@63.982,28.966
SD_DAT0: R3.1 R7.1 SD1.7 U4.79 | length 31.9
  Top Layer w0.2: U4.79@51.094,33.363 51.094,34.569 v1(51.875,35.35) 51.9,35.375 63.75,35.375 69.233,29.892 69.233,29.215 v1(69.482,28.966)
  Bottom Layer w0.2: R7.1@44.8,36.025 51.2,36.025 v1(51.875,35.35) ; R3.1@69.389,30.449 69.482,30.356 v1(69.482,28.966)
SD_DAT_PULL_UP: R6.1 SD1.1 SD1.8 | length 11.2
  Top Layer w0.2: SD1.1@62.882,28.966 63.182,28.666 63.182,27.908 63.42,27.67 70.024,27.67 70.282,27.928 70.282,28.666 v1(70.582,28.966)
  Bottom Layer w0.2: v1(70.582,28.966) 70.582,30.372 R6.1@70.659,30.449
SPI1_MISO: U4.30 U5.15 | length 7.8
  Top Layer w0.2: U5.15@38.375,13.525 38.375,14.375 39.498,15.498 41.76,15.498 42.594,16.332 U4.30@42.594,18.213
SPI1_MOSI: U4.31 U5.14 | length 7.7
  Top Layer w0.2: U5.14@39.025,13.525 39.025,14.55 39.646,15.171 41.896,15.171 43.094,16.369 U4.31@43.094,18.213
SPI1_nCS: U4.28 U5.1 | length 13.6
  Top Layer w0.2: U5.1@37.725,7.925 37.725,8.45 37.275,8.9 37.275,14.237 39.19,16.152 41.427,16.152 41.594,16.319 U4.28@41.594,18.213
SPI1_SCLK: U4.29 U5.16 | length 7.8
  Top Layer w0.2: U5.16@37.725,13.525 37.754,13.554 37.754,14.254 39.325,15.825 41.625,15.825 42.094,16.294 U4.29@42.094,18.213
SWCLK: J1.4 U4.76 | length 7.4
  Top Layer w0.2: U4.76@52.594,33.363 52.594,33.372 52.6,33.378 52.883,33.378 v1(53.33,33.825)
  Bottom Layer w0.2: v1(53.33,33.825) v1(53.33,40.32)
SWDIO: J1.2 U4.72 | length 11.9
  Top Layer w0.2: U4.72@54.169,30.288 54.167,30.29 53.31,30.29 53.05,30.55 53.05,31.9 54.199,33.049 v1(54.575,33.05) v1(54.575,33.05)
  Bottom Layer w0.2: v1(54.575,33.05) 54.575,40.295 v1(54.6,40.32)
SWO: J1.6 U4.89 | length 11.1
  Top Layer w0.2: U4.89@46.094,33.363 46.094,34.619 46.825,35.35 49.65,35.35 52.06,37.76 v1(52.06,40.32)
VCC_SENSE: R14.1 R16.1
X32_N: C28.1 U4.9 Y2.2 | length 6.8
  Top Layer w0.2: C28.1@32.892,27.2 33.167,27.475 33.167,27.769 33.284,27.886 34.011,27.886 34.073,27.825 34.53,27.825 Y2.2@34.717,27.637 34.905,27.825 35.361,27.825 35.423,27.886 37.243,27.886 37.255,27.875 38.357,27.875 38.444,27.788 U4.9@39.019,27.788
X32_P: C27.1 U4.8 Y2.1 | length 6.8
  Top Layer w0.2: C27.1@32.892,28.9 33.167,28.625 33.167,28.331 33.284,28.213 34.011,28.213 34.073,28.275 34.53,28.275 Y2.1@34.717,28.462 34.905,28.275 35.361,28.275 35.423,28.213 37.378,28.213 37.39,28.202 38.357,28.202 38.444,28.288 U4.8@39.019,28.288
X_N: C25.2 U4.13 Y1.1 | length 10.6
  Top Layer w0.2: C25.2@32.925,19.975 33.15,20.2 Y1.1@33.15,21.575 32.725,22 32.725,22.554 32.842,22.671 33.904,22.671 35.457,24.224 37.108,25.874 38.357,25.874 38.444,25.788 U4.13@39.019,25.788
X_P: C24.2 U4.12 Y1.3 | length 11.2
  Top Layer w0.2: C24.2@31.625,25.55 31.4,25.325 Y1.3@31.4,23.875 31.4,23.75 32.183,22.967 32.676,22.967 32.707,22.998 33.769,22.998 35.13,24.359 36.973,26.201 38.357,26.201 38.444,26.288 U4.12@39.019,26.288
pads on no net: D8.3 J1.7 J1.8 J1.9 J2. J2.2 J2.5 J3. J3.2 J3.5 U1.3 U1.7 U1.8 U1.9 U1.10 U1.13 U1.14 U4.2 U4.7 U4.15 U4.16 U4.17 U4.18 U4.22 U4.23 U4.24 U4.32 U4.33 U4.34 U4.35 U4.36 U4.37 U4.38 U4.39 U4.40 U4.41 U4.42 U4.43 U4.44 U4.45 U4.46 U4.47 U4.55 U4.56 U4.57 U4.58 U4.61 U4.62 U4.63 U4.64 U4.65 U4.66 U4.67 U4.68 U4.69 U4.70 U4.71 U4.81 U4.82 U4.83 U4.84 U4.85 U4.86 U4.87 U4.88 U4.90 U4.91 U4.92 U4.93 U4.97 U4.98 U6.3 U6.10

## Polygon pours and split planes (outlines as drawn)
GND on Bottom Layer "GND_L02_P004" (solid, pour order 4): 0,2 0,45 cw(c3,45) 3,48 72,48 cw(c72,45) 75,45 75,2 cw(c72,2) 72,-1 3,-1 cw(c3,2)
INT_3V3 on Bottom Layer "INT_3V3_L02_P003" (solid, pour order 3): 24.356,22.998 24.355,23 20.556,23 20.556,19.996 20.556,19.77 24.356,19.77
PRE_VCC on Bottom Layer "PRE_VCC_L02_P002" (solid, pour order 2): 11.675,26.463 11.675,24.813 10.038,24.813 10.038,30.163 11.675,30.163 11.675,28.513 11.175,28.513 10.95,28.175 10.95,26.775 11.175,26.463
NetC7_2 on Bottom Layer "NETC7_2_L02_P001" (solid, pour order 1): 14.381,19.4 15.381,19.4 15.856,18.55 17.456,18.55 17.456,24.25 15.856,24.25 15.856,21.4 15.381,20.1 14.381,20.1
NetF1_2 on Bottom Layer "NETF1_2_L02_P000" (solid, pour order 0): 17.275,29.388 14.475,30.838 12.195,30.888 12.195,24.738 14.475,24.788 17.275,26.238
GND on Top Layer "GND_L01_P005" (solid, pour order 5): 0,2 0,45 cw(c3,45) 3,48 72,48 cw(c72,45) 75,45 75,2 cw(c72,2) 72,-1 3,-1 cw(c3,2)

## Silkscreen, mask and mechanical layers (free items; w line width, h text height)
Top Overlay:
  text "CAN_0" at 14.2,45.367 h1
  text "DEBUG" at 45.908,45.367 h0.5
  text "RST" at 60.784,44.817 h0.5
  text "BOOT" at 64.859,44.8 h0.5
  text "CAN_0" at 35.609,44.458 h0.5
  text "CAN_1" at 39.055,44.458 h0.5
  text "PWR" at 29.384,44.417 h0.5
  text "MCU" at 32.746,44.417 h0.5
  text "SD" at 43.083,44.417 h0.5
  text "DEBUG" at 45.908,38.767 h0.5
  text "CANLink V1" at 56.579,36.504 h1.52
  text "SD" at 56.925,26.7 h1
  text "CAN_1" at 62.2,15.367 h1
  text "ANALOG IN" at 33.2,5.7 h1
  text "4 6" at 43.175,4.89 h0.5
  text "0 2" at 30.3,4.75 h0.5
  text "1 3" at 30.375,2.35 h0.5
  text "5 7" at 43.175,2.35 h0.5
Mechanical 1:
  the board outline again, w0.1

## Text inside footprints (layer, text, board x,y; h text height)
U2_CAN_0: Top 3D Body "*" at 25.733,41.745 h1.27 r270; Top Overlay "*" at 26.611,42.869 h1.27 r270
U2_CAN_1: Top 3D Body "*" at 50.148,3.998 h1.27 r90; Top Overlay "*" at 49.27,2.874 h1.27 r90